# Altium PCB PogoPinSideBrd.PcbDoc
Units mil, origin at the board's own origin, x right, y up, seen from the top; angles counter-clockwise.
Board outline 2249.83 x 2182.15 mil, 2 copper layers (Top Layer, Bottom Layer); 17 components, 16 nets, 37 pads, 6 vias.
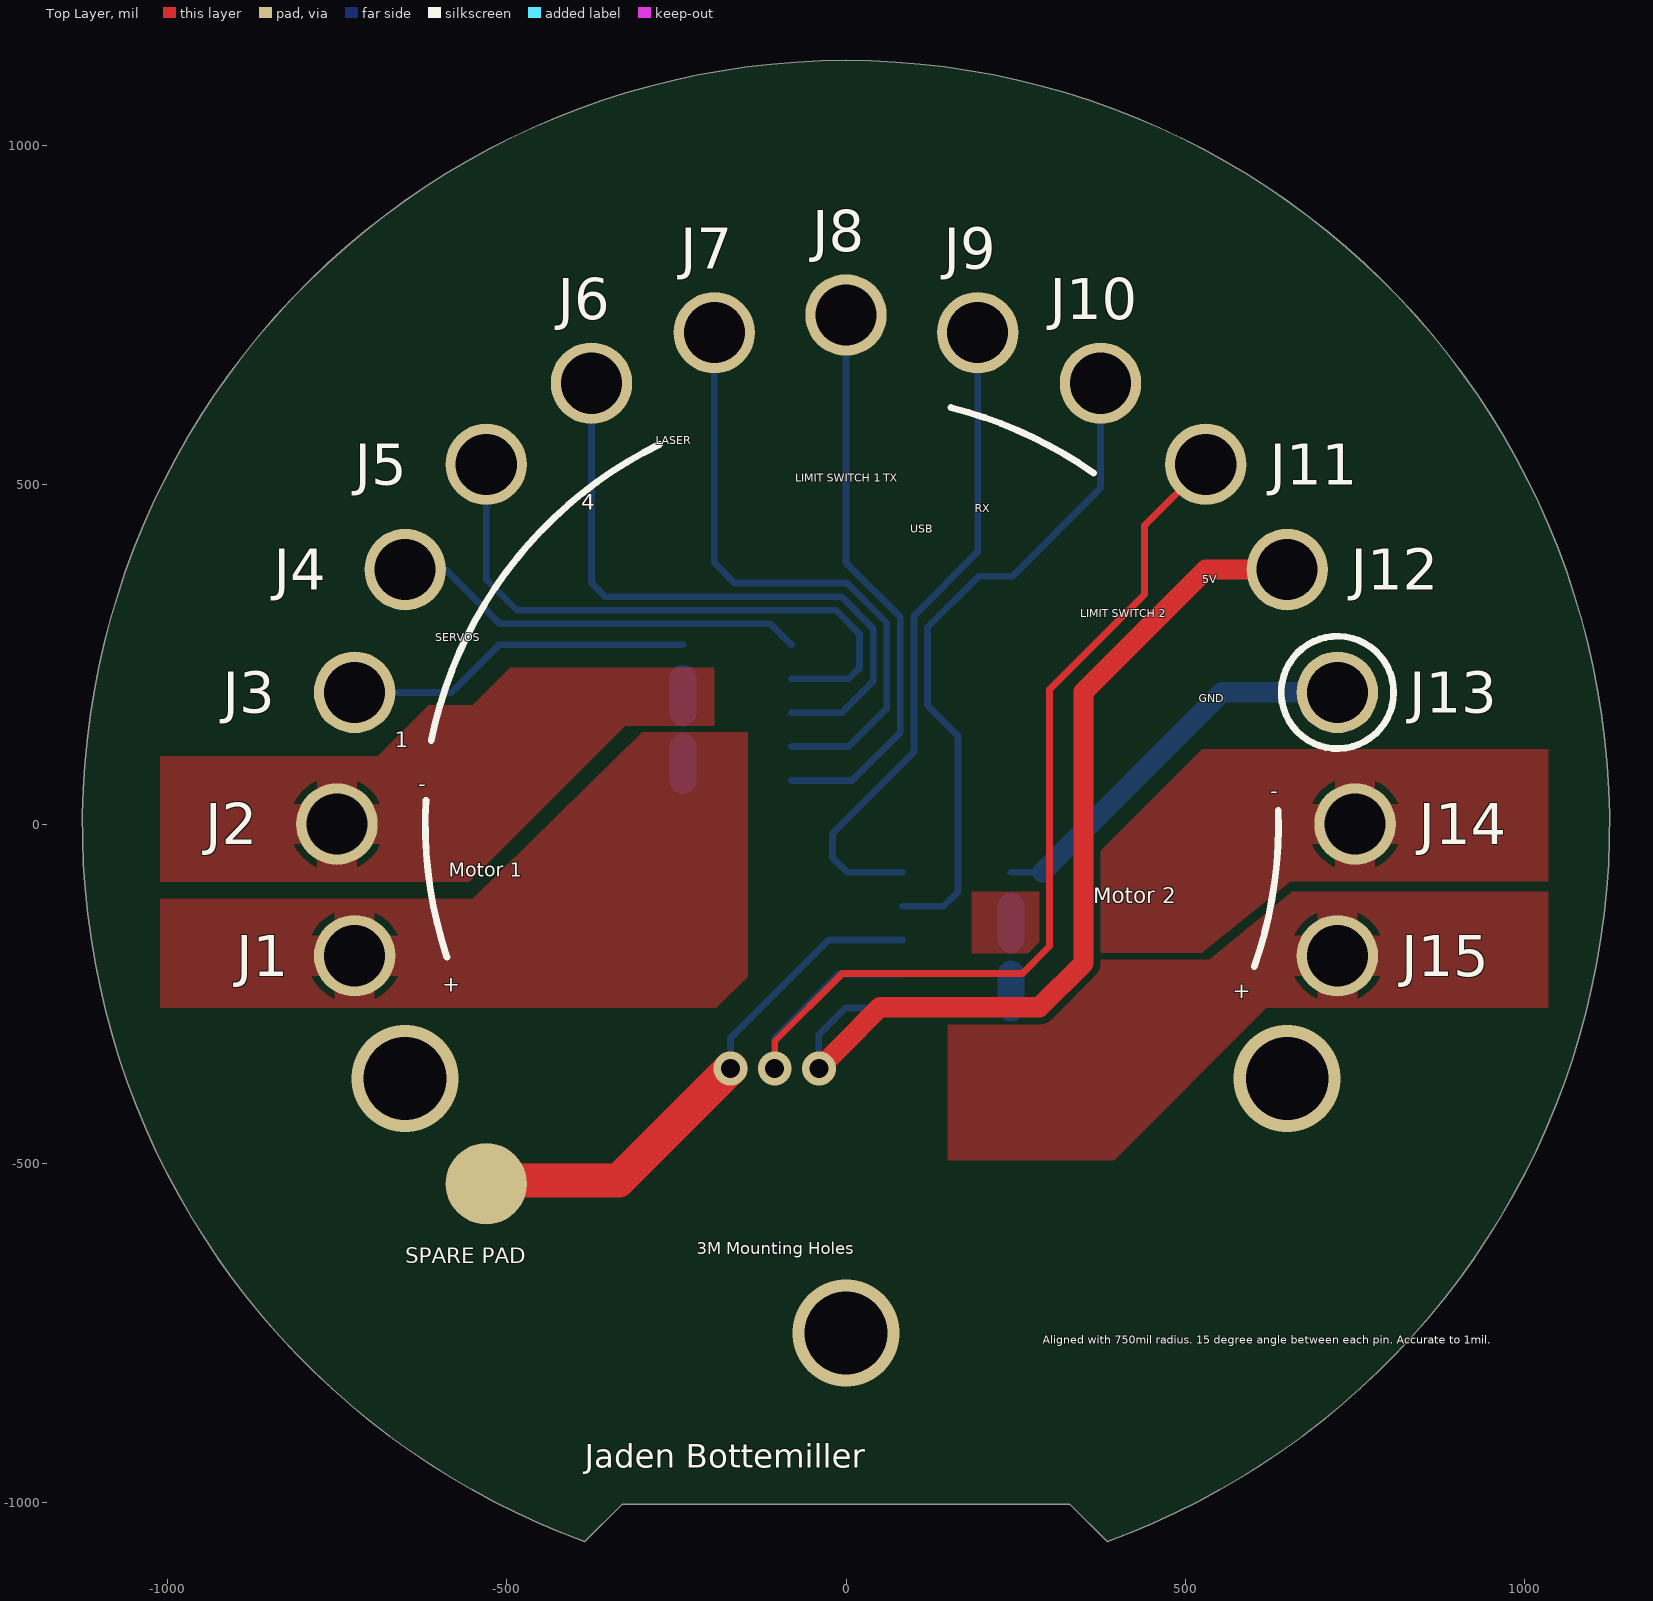
[diagram p0: Top Layer view]
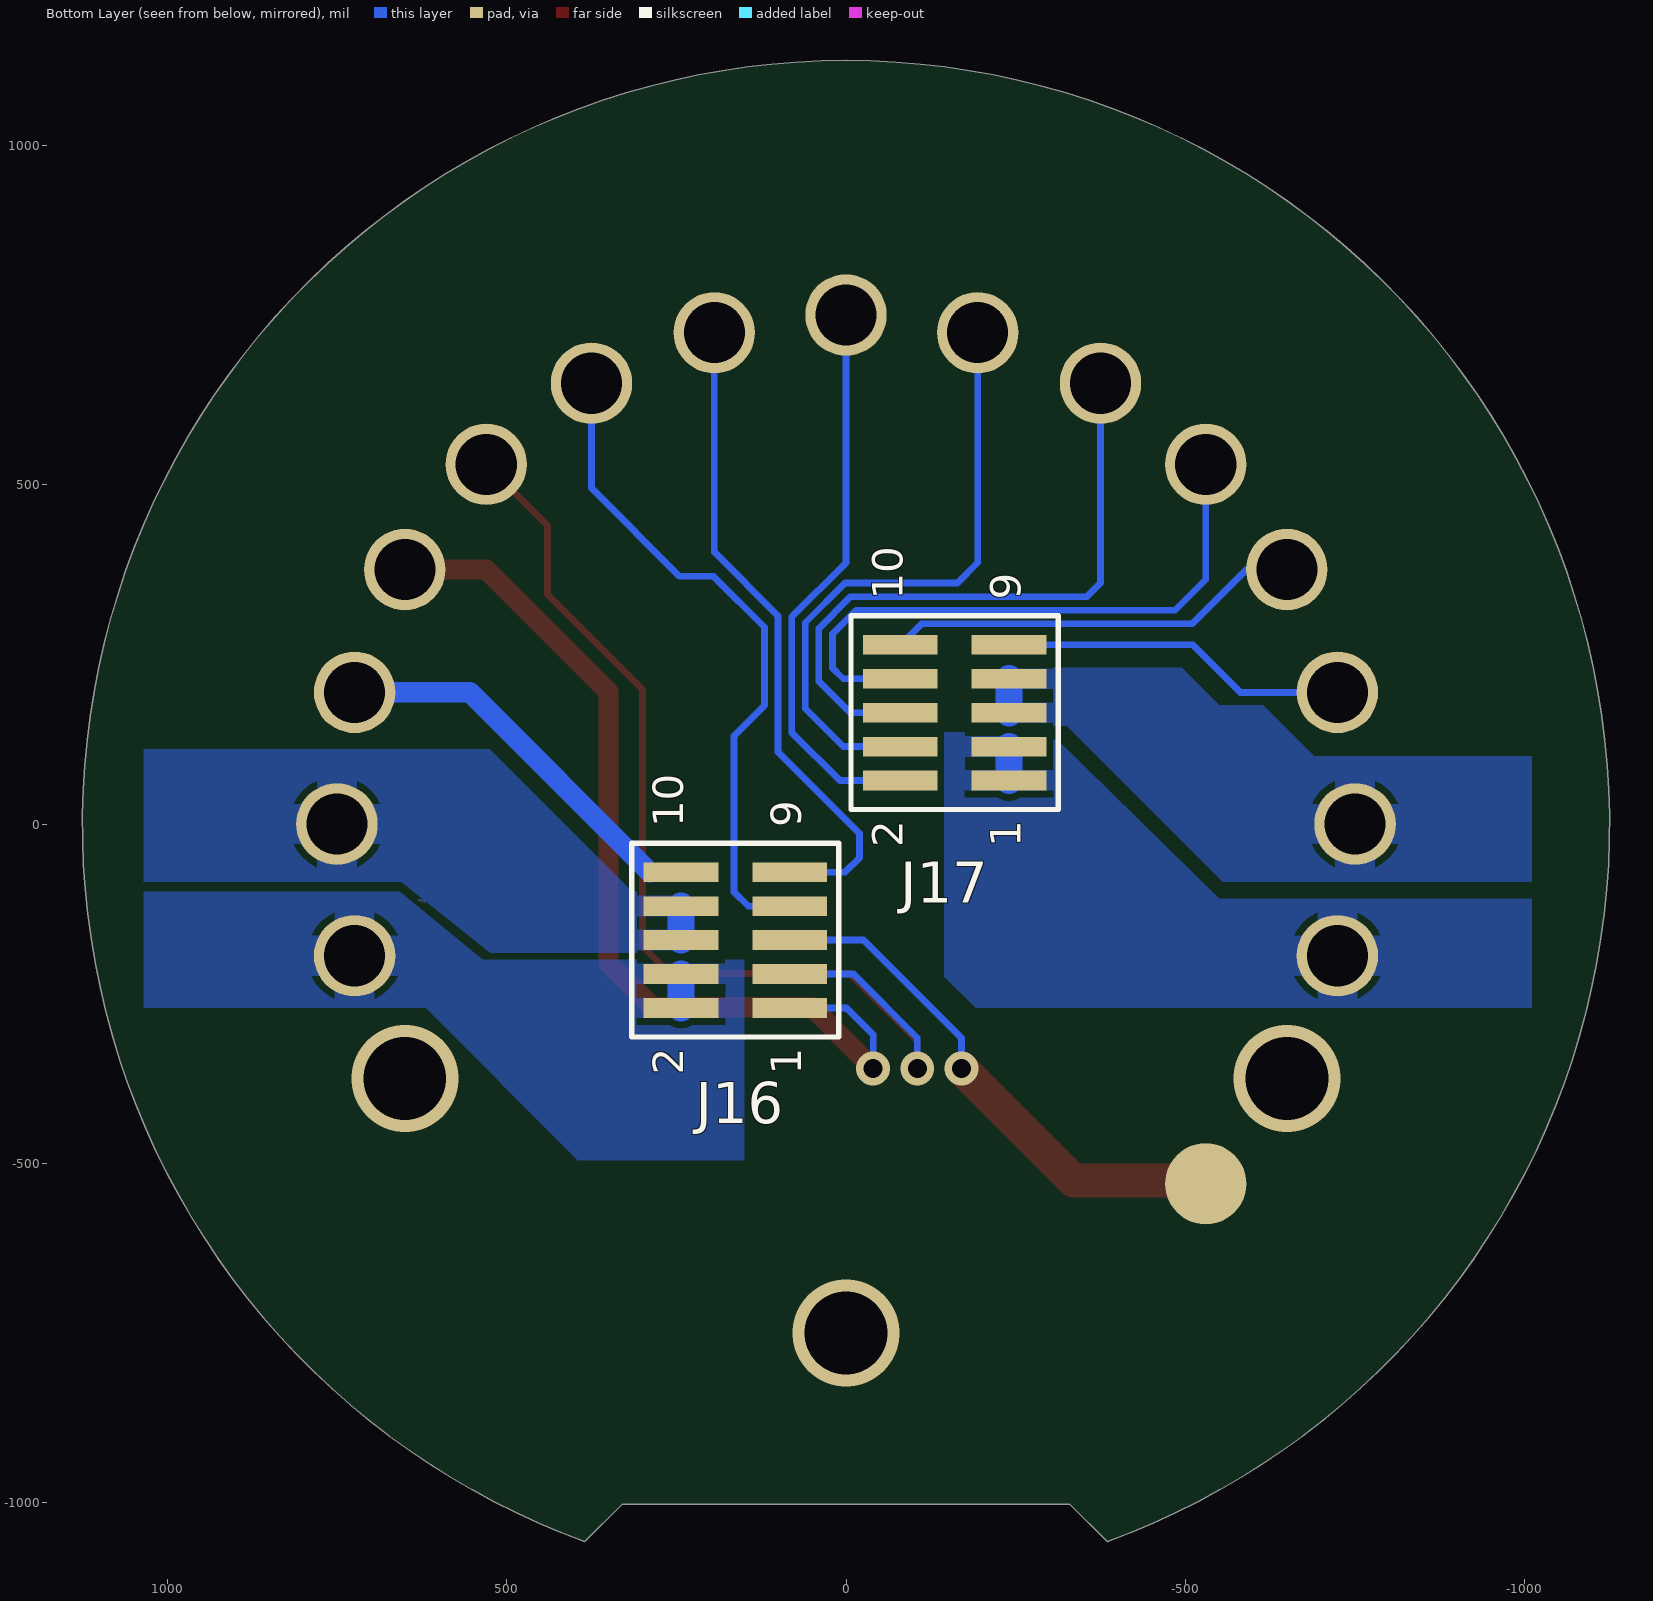
[diagram p1: Bottom Layer view, seen from below]

## Layer stack, top to bottom
Top Solder: solder mask 0.4, Solder Resist, Dk 3.5
Top Layer: signal copper 1.4
Dielectric 1: dielectric 12.6, FR-4, Dk 4.8
Bottom Layer: signal copper 1.4
Bottom Solder: solder mask 0.4, Solder Resist, Dk 3.5

## Board outline
-384.77,-1057.15 -330,-1002.38 330,-1002.38 384.77,-1057.15 ccw(c0,0)

## Design rules (kind name [scope] priority, off if disabled: settings)
Clearance [All] p1: gap=10 ignorepadtopadclearanceinfootprint=FALSE except(0: Arc-Hole Track-Hole SMDPad-Hole THPad-Hole Via-Hole Fill-Hole Poly-Hole Region-Hole Text-Hole)
PolygonConnect [All] p1: thpad.connectstyle=Relief thpad.reliefconductorwidth=60 thpad.reliefentries=4 thpad.polygonreliefangle="90 Angle" thpad.airgapwidth=10 smdpad.connectstyle=Relief smdpad.reliefconductorwidth=30 smdpad.reliefentries=4 smdpad.polygonreliefangle="90 Angle" smdpad.airgapwidth=10 via.connectstyle=Relief via.reliefconductorwidth=60 via.reliefentries=4 via.polygonreliefangle="90 Angle" via.airgapwidth=10
RoutingVias [All] p1: holewidth=28 width=50 viastyle="Through Hole" minholewidth=28 minwidth=50 maxholewidth=28 maxwidth=50
SolderMaskExpansion [All] p1: expansion=4
Width [All] p1: maxlimit=300 minlimit=10 preferedwidth=10 minimp=50.000000 maximp=50.000000 favimp=50.000000
30 further rules are at their usual default settings.

## Components (designator, comment, footprint, x,y, rotation, side; value= is the part's Value field where it differs from the comment)
J1 "PogoPin" PCBComponent_1#1 1240,-930 r0 top
J2 "PogoPin" PCBComponent_1#2 2685,175 r0 top
J3 "PogoPin" PCBComponent_1#3 -710,410 r0 top
J4 "PogoPin" PCBComponent_1#4 -515,550 r0 top
J5 "PogoPin" PCBComponent_1#5 -260,645 r0 top
J6 "PogoPin" PCBComponent_1#6 60,655 r0 top
J7 "PogoPin" PCBComponent_1#7 385,420 r0 top
J8 "PogoPin" PCBComponent_1#8 675,55 r0 top
J9 "PogoPin" PCBComponent_1#9 745,-220 r0 top
J10 "PogoPin" PCBComponent_1#10 645,-500 r0 top
J11 "PogoPin" PCBComponent_1#11 345,-710 r0 top
J12 "PogoPin" PCBComponent_1#12 -45,-665 r0 top
J13 "PogoPin" PCBComponent_1#13 -465,-590 r0 top
J14 "PogoPin" PCBComponent_1#14 730,-50 r0 top
J15 "PogoPin" PCBComponent_1#15 2510,175 r0 top
J16 "10-Pin Std Conn" FTSH-105-01-F-DV 173.24,-180 r90 bottom
J17 "10-Pin Std Conn" FTSH-105-01-F-DV -150,155 r90 bottom

## Footprints (in the part's own frame and the unit in brackets; to place one, negate y for a bottom-side part, rotate by r counter-clockwise, add the part's x,y. Pads: shape width x height; smd on the part's side, far side on the other; paste and mask are expansions set on the pad)
FTSH-105-01-F-DV [mm]
  rect 0.74x2.79 smd: 1(-2.31,-2.289) 2(-2.31,1.775) 3(-1.04,-2.289) 4(-1.04,1.775) 5(0.23,-2.289) 6(0.23,1.775) 7(1.5,-2.289) 8(1.5,1.775) 9(2.77,-2.289) 10(2.77,1.775)
  silkscreen extent -3.4,-4.14 3.86,3.62
PCBComponent_1#1 [mil]
  round 120 hole 90: 1(-1964,736)
PCBComponent_1#2 [mil]
  round 120 hole 90: 1(-3435,-175)
PCBComponent_1#3 [mil]
  round 120 hole 90: 1(-14,-216)
PCBComponent_1#4 [mil]
  round 120 hole 90: 1(-134.5,-175)
PCBComponent_1#5 [mil]
  round 120 hole 90: 1(-270,-115)
PCBComponent_1#6 [mil]
  round 120 hole 90: 1(-435,-5.5)
PCBComponent_1#7 [mil]
  round 120 hole 90: 1(-579,304)
PCBComponent_1#8 [mil]
  round 120 hole 90: 1(-675,695)
PCBComponent_1#9 [mil]
  round 120 hole 90: 1(-551,944)
PCBComponent_1#10 [mil]
  round 120 hole 90: 1(-270,1149.5)
PCBComponent_1#11 [mil]
  round 120 hole 90: 1(185,1240)
PCBComponent_1#12 [mil]
  round 120 hole 90: 1(695,1040)
PCBComponent_1#13 [mil]
  round 120 hole 90: 1(1189,784)
PCBComponent_1#14 [mil]
  round 120 hole 90: 1(20,50)
PCBComponent_1#15 [mil]
  round 120 hole 90: 1(-1786,-369)

## Free pads (board coordinates)
  round 120 smd far side: S(-530,-530)
  round 120 smd: S(-530,-530)

## Via types
v1: diameter 50, hole 28, Top Layer to Bottom Layer, 3 vias
v2: diameter 157.48, hole 122.05, Top Layer to Bottom Layer, 3 vias

## Nets (pads, with @x,y where several pads share a name; then routed paths per layer and width w, separated by ;. In a path a pad name is that pad's centre, name@x,y a point inside that pad or via, vN(x,y) a via of type N, cw(c..) or ccw(c..) an arc to the next point about the centre after c; other vN are vias at no path point)
5V: J12.1 J16.1 | length 1418.1
  Top Layer w30: v1(-40,-360) -10,-330 50,-270 285,-270 350,-205 350,-158.28 350,195 530,375 J12.1
  Bottom Layer w10: v1(-40,-360) -40,-310 -0.94,-270.94 J16.1
GND: J13.1 J16.10 | length 590.6
  Bottom Layer w10: J16.10 J16.10@289.06,-70.94
  Bottom Layer w30: J16.10@289.06,-70.94 554,194 J13.1
LASER: J7.1 J17.4 | length 919.5
  Bottom Layer w10: J7.1 -194,385 -164,355 1.57,355 60,296.57 60,170 4.06,114.06 J17.4
LIM1: J8.1 J17.2 | length 837.6
  Bottom Layer w10: J17.2 9.06,64.06 80,135 80,304.85 0,384.85 J8.1
LIM2: J11.1 J16.3 | length 1587.4
  Top Layer w10: v1(-105,-360) -105,-320 -5,-220 260,-220 300,-180 300,198.28 440,338.28 440,440 J11.1
  Bottom Layer w10: v1@-100,-355 v1(-105,-360) -105,-315 -10.94,-220.94 J16.3
MOTOR1+: J1.1 J17.1 J17.3 | length 50
  Bottom Layer w40: J17.1 J17.3
MOTOR1-: J2.1 J17.5 J17.7 | length 50
  Bottom Layer w40: J17.5 J17.7
MOTOR2+: J15.1 J16.2 J16.4 | length 50
  Bottom Layer w40: J16.2 J16.4
MOTOR2-: J14.1 J16.6 J16.8 | length 50
  Bottom Layer w40: J16.6 J16.8
SERVO1: J3.1 J17.9 | length 512.9
  Bottom Layer w10: J3.1 -581,194 -510.94,264.06 J17.9
SERVO2: J4.1 J17.10 | length 615.3
  Bottom Layer w10: J4.1 -590,375 -510,295 -111.06,295 J17.10
SERVO3: J5.1 J17.8 | length 909.9
  Bottom Layer w10: J5.1 -530,360 -485,315 -15,315 20,280 20,230 4.06,214.06 J17.8
SERVO4: J6.1 J17.6 | length 954.6
  Bottom Layer w10: J6.1 -375,355 -355,335 -6.72,335 40,288.28 40,210 -5.94,164.06 J17.6
SPARE: J16.5 pad.S@-530,-530 | length 788.2
  Top Layer w10: pad.S@-530,-530 pad.S@-525,-525
  Top Layer w50: pad.S@-525,-525 -335,-525 v1(-170,-360)
  Bottom Layer w10: v1(-170,-360) -170,-315 -25.94,-170.94 J16.5
USBRX: J10.1 J16.7 | length 993.6
  Bottom Layer w10: J16.7 144.06,-120.94 165,-100 165,130 120,175 120,290 195,365 245,365 375,495 J10.1
USBTX: J9.1 J16.9 | length 974.3
  Bottom Layer w10: J16.9 1.21,-70.94 -20,-49.74 -20,-14.06 100,105.94 100,306.65 194,400.65 J9.1
copper on no net:
  other v2: 0,-750 -649.5,-375 650,-375

## Polygon pours and split planes (outlines as drawn)
MOTOR2- on Bottom Layer "Bottom Layer-MOTOR2-" (solid, pour order 12): 185,-190.47 185,-100 315,-100 525,110 1035,110 1035,-85 655,-85 523.53,-190.47
no net on Bottom Layer "Bottom Layer-No Net" (solid, pour order 10): 620,-115 620,-112.5 630,-112.5
MOTOR2+ on Bottom Layer "Bottom Layer-MOTOR2+" (solid, pour order 8): 150,-200 150,-495 395,-495 619.06,-270.95 1035,-270.94 1035,-100 657.22,-100 535,-200
MOTOR1+ on Bottom Layer "Bottom Layer-MOTOR1+" (solid, pour order 6): -300,135 -145,135 -145,-225 -190.94,-270.94 -1010,-270.94 -1010,-110 -550,-110
MOTOR1- on Bottom Layer "Bottom Layer-MOTOR1-" (solid, pour order 2): -194,230 -194,145 -325,145 -555,-85 -1010,-85 -1010,100 -690,100 -615,175 -550,175 -495,230
MOTOR1+ on Top Layer "Bottom Layer-MOTOR1+" (solid, pour order 18): -300,135 -145,135 -145,-225 -190.94,-270.94 -1010,-270.94 -1010,-110 -550,-110
MOTOR1- on Top Layer "Bottom Layer-MOTOR1-" (solid, pour order 20): -194,230 -194,145 -325,145 -555,-85 -1010,-85 -1010,100 -690,100 -615,175 -550,175 -495,230
MOTOR2- on Top Layer "Bottom Layer-MOTOR2-" (solid, pour order 16): 185,-190 185,-99.53 315,-99.53 525,110.47 1035,110.47 1035,-84.53 655,-84.53 523.53,-190
MOTOR2+ on Top Layer "Bottom Layer-MOTOR2+" (solid, pour order 14): 150,-200 150,-495 395,-495 619.06,-270.95 1035,-270.94 1035,-100 657.22,-100 535,-200

## Silkscreen, mask and mechanical layers (free items; w line width, h text height)
Top Overlay:
  circle w10: c724,194 r82.81
  lines w10: -618.85,34.94 ccw(c0,0) -588.03,-196.01 ; -611.03,123.15 cw(c0,0) -274.6,559.57 ; 154.84,613.62 cw(c0,0) 364.57,517.29 ; 601.5,-210.28 ccw(c0,0) 636.89,20.06
  text "LASER" at -280,555 h20
  text "LIMIT SWITCH 1" at -75,500 h20
  text "TX" at 55,500 h20
  text "4" at -390,455 h40
  text "RX" at 190,455 h20
  text "USB" at 95,425 h20
  text "5V" at 525,350 h20
  text "LIMIT SWITCH 2" at 345,300 h20
  text "SERVOS" at -605,265 h20
  text "GND" at 520,175 h20
  text "1" at -665,105 h40
  text "-" at -630,40 h40
  text "-" at 625,30 h40
  text "Motor 1" at -585,-85 h35
  text "Motor 2" at 364.57,-125 h40
  text "+" at -595,-255 h40
  text "+" at 570,-265 h40
  text "3M Mounting Holes" at -220,-640 h30
  text "SPARE PAD" at -649.5,-655 h40
  text "Aligned with 750mil radius. 15 degree angle between each pin. Accurate to 1mil." at 290,-770 h20
  text "Jaden Bottemiller" at -385,-960 h60
Mechanical 1:
  lines w10: 312,312.5 312.5,-312.5 -312.5,-312.5 -312.5,312.5 312.5,312.5 ; -384.77,-1057.15 cw(c0,0) 384.77,-1057.15 330,-1002.38 -330,-1002.38 -384.77,-1057.15

## Text inside footprints (layer, text, board x,y; h text height)
J16: Mechanical 16 "1" at 51.11,-369.01 h77.5 r270; Mechanical 16 "2" at 225.13,-369.01 h77.5 r270; Mechanical 16 "9" at 51.11,-4.36 h77.5 r270; Mechanical 16 "10" at 225.13,-4.36 h77.5 r270; Bottom Overlay "1" at 51.11,-369.01 h77.5 r270; Bottom Overlay "2" at 225.13,-369.01 h77.5 r270; Bottom Overlay "9" at 51.11,-4.36 h77.5 r270; Bottom Overlay "10" at 225.13,-4.36 h77.5 r270
J17: Mechanical 16 "1" at -272.13,-34.01 h77.5 r270; Mechanical 16 "2" at -98.11,-34.01 h77.5 r270; Mechanical 16 "9" at -272.13,330.64 h77.5 r270; Mechanical 16 "10" at -98.11,330.64 h77.5 r270; Bottom Overlay "1" at -272.13,-34.01 h77.5 r270; Bottom Overlay "2" at -98.11,-34.01 h77.5 r270; Bottom Overlay "9" at -272.13,330.64 h77.5 r270; Bottom Overlay "10" at -98.11,330.64 h77.5 r270